# Altium PCB EPCI-0106-V.1.0.PcbDoc
Units mil, origin at the board's own origin, x right, y up, seen from the top; angles counter-clockwise.
Board outline 1762.85 x 2269.87 mil, 2 copper layers (Top Layer, Bottom Layer), stack 62 mil thick; 70 components, 36 nets, 262 pads, 14 vias.
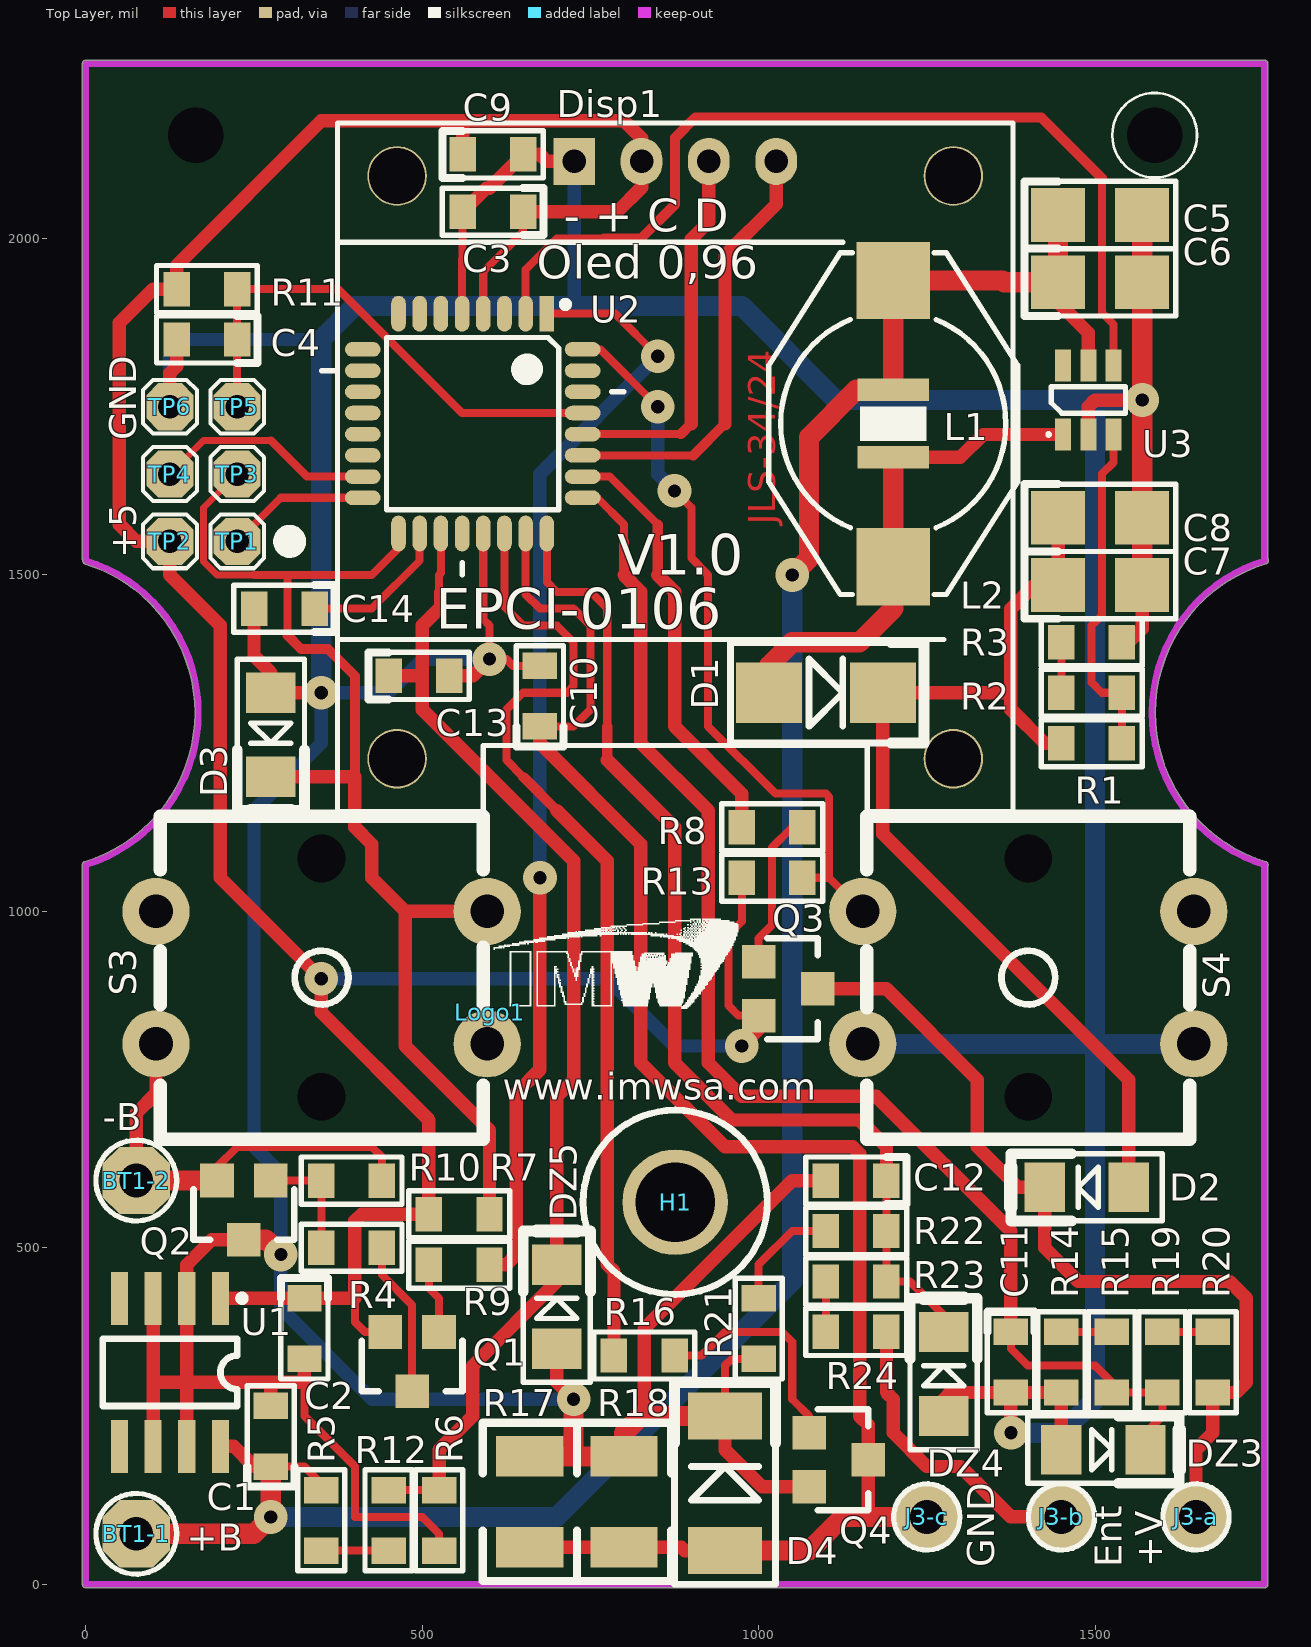
[diagram p0: Top Layer view]
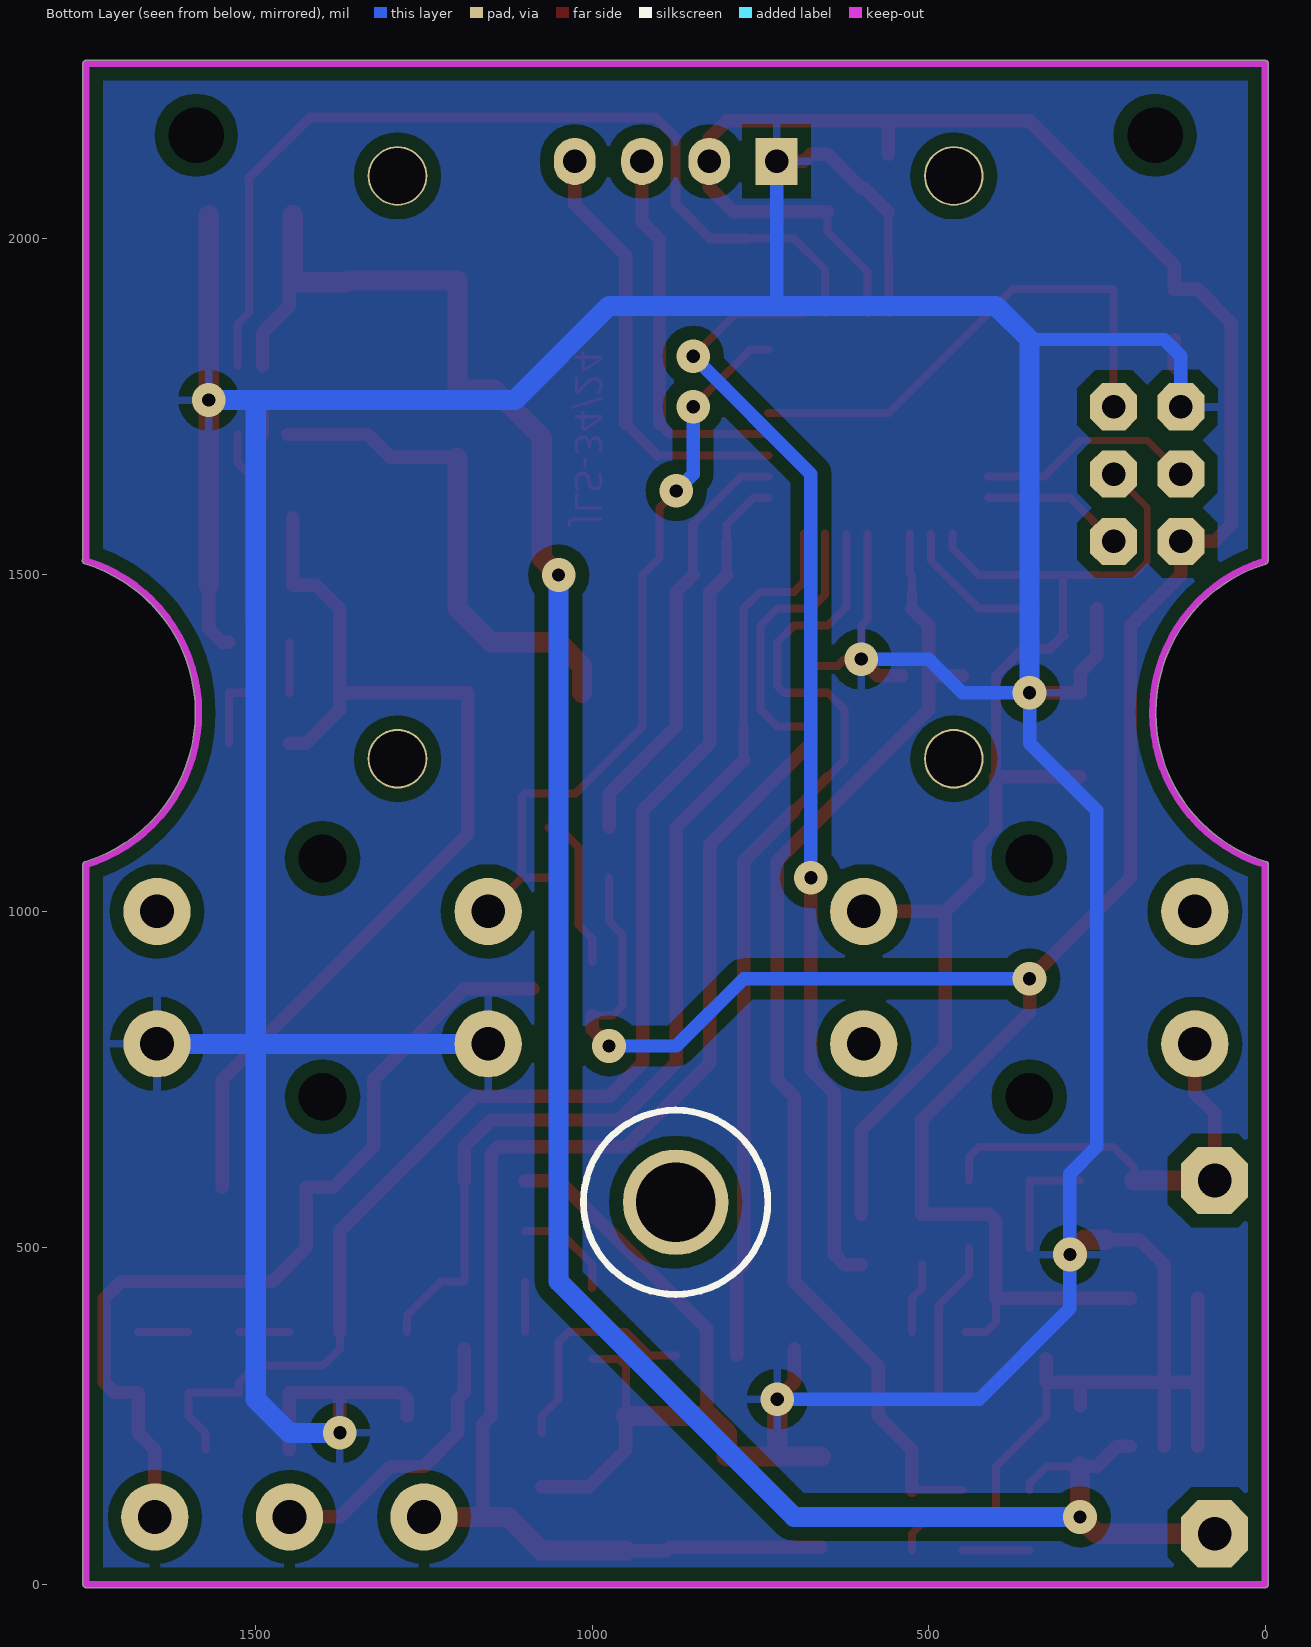
[diagram p1: Bottom Layer view, seen from below]
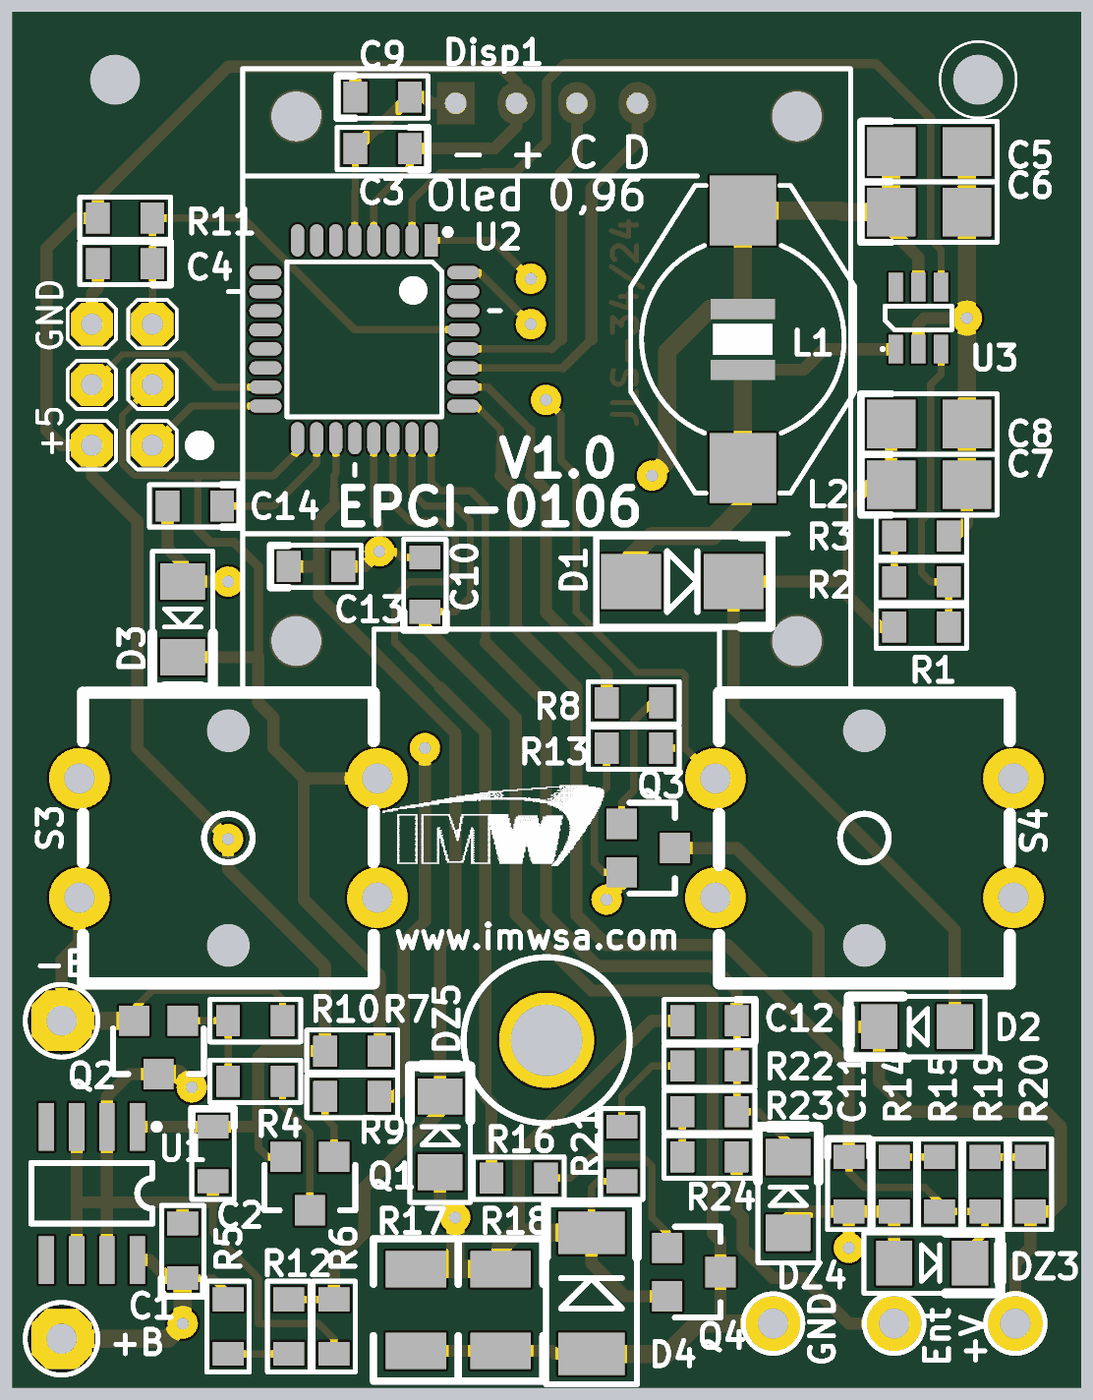
[diagram p2: 3D render of the assembled board from above, using the file's embedded part models]

## Layer stack, top to bottom
Top Layer: signal copper 1.4
Dielectric: core 59.2, FR-4, Dk 4.8
Bottom Layer: signal copper 1.4

## Board outline
-5.01,0 -5.01,1068.38 cw(c-0.09,1069.3) -1.55,1074.1 ccw(c-68.9,1295.28) 162.31,1295.28 ccw(c-68.9,1295.28) -0.86,1516.24 cw(c0.62,1521.04) -4.37,1521.55 cw(c0,1524.02) -5.01,1524.02 -5.01,2259.84 cw(c0,2259.84) 0.06,2264.86 1751.97,2264.86 cw(c1751.97,2259.84) 1756.98,2259.84 1756.98,1524.13 cw(c1752.74,1521.46) 1757.75,1521.46 cw(c1752.74,1521.46) 1754.17,1516.65 cw(c1820.87,1295.28) 1754.18,1516.66 1754.17,1516.65 ccw(c1820.87,1295.28) 1753.52,1074.1 cw(c1752.05,1069.3) 1757.07,1069.3 cw(c1752.05,1069.3) 1756.98,1068.37 1756.98,0 cw(c1751.97,0) 1751.97,-5.02 0,-5.02 cw(c0,0)

## Design rules (kind name [scope] priority, off if disabled: settings)
Clearance Poly [inpoly] p1: gap=20
Clearance Clearance_1 [All] p2: gap=9
ComponentClearance [All] p1 off: gap=10 collisioncheckmode=3 verticalgap=10 showdistances=FALSE
FanoutControl Fanout_BGA [IsBGA] p1 off: bgadir=Out bgaviamode=Centered fanoutstyle=Auto fanoutdirection=Alternating viagrid=1 // Fanout_BGA (Default Rule)
FanoutControl Fanout_LCC [IsLCC] p2 off: bgadir=Out bgaviamode=Centered fanoutstyle=Auto fanoutdirection=Alternating viagrid=1 // Fanout_LCC (Default Rule)
FanoutControl Fanout_SOIC [IsSOIC] p3 off: bgadir=Out bgaviamode=Centered fanoutstyle=Auto fanoutdirection=Alternating viagrid=1 // Fanout_SOIC (Default Rule)
HoleSize [All] p1: absolutevalues=TRUE maxlimit=196.85 minlimit=1 maxpercent=80.000 minpercent=20.000
PolygonConnect [All] p1: connectstyle=Relief reliefconductorwidth=12 reliefentries=4 polygonreliefangle="90 Angle"
RoutingVias [All] p1: holewidth=23.62 width=55 viastyle="Through Hole" minholewidth=19.68 minwidth=50 maxholewidth=29.53 maxwidth=60
SolderMaskExpansion [All] p1: expansion=4
TestPointUsage [All] p1: valid=0 allowmultiple=FALSE
Testpoint [All] p1: side=15 testpointundercomponent=TRUE minsize=40 maxsize=100 preferedsize=60 minholesize=0 maxholesize=40 preferedholesize=32 testpointgrid=1 style=1023 order=0123456789
Width [All] p1: maxlimit=30 minlimit=8 preferedwidth=12 bottomlayer_minwidth=20 bottomlayer_prefwidth=20 minimp=50.000000 maximp=50.000000 favimp=50.000000
14 further rules are at their usual default settings.

## Components (designator, comment, footprint, x,y, rotation, side; value= is the part's Value field where it differs from the comment)
BT1-1 "TEST POINT" TP_1#1 75,75 r90 top
BT1-2 "TEST POINT" TP_1#1 75,600 r90 top
C1 "10uF/50V" C0805MINIMO 275,175 r90 top
C2 "100nF" C0805MINIMO 325,425 r270 top
C3 "100nF" C0805MINIMO 650,2040 r180 top
C4 "100nF" C0805MINIMO 225,1850 r180 top
C5 "10uF 50V X5R" C1206 1445,2035 r0 top
C6 "10uF 50V X5R" C1206 1445,1935 r0 top
C7 "10uF 50V X5R" C1206 1445,1485 r0 top
C8 "10uF 50V X5R" C1206 1445,1585 r0 top
C9 "100nF" C0805MINIMO 560,2125 r0 top
C10 "100nF" C0805MINIMO 675,1275 r90 top
C11 "100nF" C0805MINIMO 1375,375 r270 top
C12 "100nF" C0805MINIMO 1190,600 r180 top
C13 "100nF" C0805MINIMO 450,1350 r0 top
C14 "100nF" C0805MINIMO 340,1450 r180 top
D1 "B340LB-13-F" smb 1100,1325 r180 top
D2 "MBR0520LT1G" DL35 1550,590 r0 top
D3 "MBR0520LT1G" DL35 275,1325 r90 top
D4 "1N4007" DL45 950,50 r270 top
Disp1 "O_led 0.96" "Oled 0.96 Nodotech" 875.98,1660 r0 top locked
DZ3 "5V1 .5W" DL35 1450,200 r180 top
DZ4 "5V1 .5W" DL35 1275,250 r270 top
DZ5 "5V1 .5W" DL35 700,350 r270 top
H1 "TORNILLO" Tornillo 875.98,567.72 r0 top locked
J3-a "+V" TP_1#2 1650,100 r90 top
J3-b "Ent" TP_1#2 1450,100 r90 top
J3-c "GND" TP_1#2 1250,100 r90 top
L1 "10uHy" L1210 1200,1725 r270 top
L2 "22uHy" SMTDR0804 1200,1725 r270 top
Logo1 "LOGO" "IMW Serigrafía" 600,850 r0 top
Q1 "BC807" "SOT23 - BC817" 525,375 r0 top
Q2 "BC817" "SOT23 - BC817" 275,600 r0 top
Q3 "BC807" "SOT23 - BC817" 1000,925 r90 top
Q4 "BC817" "SOT23 - BC817" 1075,225 r90 top
R1 "47K 1/10W" R0805MINIMO 1450,1250 r0 top
R2 "2K2 1/10W" R0805MINIMO 1450,1325 r0 top
R3 "2x330R 1/10W" R0805MINIMO 1450,1400 r0 top
R4 "1K 1/8W" R0805MINIMO 350,500 r0 top
R5 "56K 1/8W" R0805MINIMO 350,50 r90 top
R6 "10K 1/8W" R0805MINIMO 525,50 r90 top
R7 "10K 1/8W" R0805MINIMO 600,550 r180 top
R8 "2K2 1/8W" R0805MINIMO 975,1125 r0 top
R9 "4K7 1/8W" R0805MINIMO 600,475 r180 top
R10 "10K 1/8W" R0805MINIMO 350,600 r0 top
R11 "10K 1/10W" R0805MINIMO 225,1925 r180 top
R12 "27K 1/8W" R0805MINIMO 450,50 r90 top
R13 "10K 1/10W" R0805MINIMO 975,1050 r0 top
R14 "2x33R 1/8W" R0805MINIMO 1450,285 r90 top
R15 "4K7 1/8W" R0805MINIMO 1525,375 r270 top
R16 "2K2 1/8W" R0805MINIMO 875,340 r180 top
R17 "1R 1/2W" R1210 660,190 r270 top
R18 "1R 1/2W" R1210 800,190 r270 top
R19 "27K 1/8W" R0805MINIMO 1600,375 r270 top
R20 "56K 1/8W" R0805MINIMO 1675,375 r270 top
R21 "2x33R 1/8W" R0805MINIMO 1000,335 r90 top
R22 "4K7 1/8W" R0805MINIMO 1100,525 r0 top
R23 "27K 1/8W" R0805MINIMO 1100,450 r0 top
R24 "56K 1/8W" R0805MINIMO 1100,375 r0 top
S3 "" "Pul 12x12 Omron B3F" 350.39,901.57 r180 top locked
S4 "" "Pul 12x12 Omron B3F" 1400.79,901.57 r0 top locked
TP1 "MISO" TP_0 225,1550 r180 top
TP2 "+5" TP_0 125,1550 r180 top
TP3 "SCK" TP_0 225,1650 r180 top
TP4 "MOSI" TP_0 125,1650 r180 top
TP5 "RST" TP_0 225,1750 r180 top
TP6 "GND" TP_0 125,1750 r180 top
U1 "LM78L05-soic8" SOIC8-150 200,425 r270 top
U2 "ATmega328P-AU" TQFP32 575,1725 r270 top
U3 "MT3608" SOT23-6 1490,1760 r0 top

## Footprints (in the part's own frame and the unit in brackets; to place one, negate y for a bottom-side part, rotate by r counter-clockwise, add the part's x,y. Pads: shape width x height; smd on the part's side, far side on the other; paste and mask are expansions set on the pad)
C0805MINIMO [mm]
  rect 1x1.3 smd: 1(0,0) 2(2.286,0)
  oct 0.8x1.1 on Top Paste: z(0,0) z(2.286,0)
  silkscreen extent -0.76,-0.89 3.05,0.89, body extent -0.13,-0.64 2.47,0.62, height 0.78
C1206 [mil]
  rect 80x80 smd: 1(0,0) 2(125,0)
  oct 78x78 on Top Paste: z(0,0) z(125,0)
  silkscreen extent -50,-50 175,50, body extent 0,-30 126,33, height 39
DL35 [mil]
  rect 60x74 smd: 1(0,0) 2(-125,0)
  silkscreen extent -175,-50 50,50, body extent -129,-30 9,27, height 57
DL45 [mil]
  rect 70x110 smd: 1(0,0) 2(-200,0)
  silkscreen extent -250,-75 50,75, body extent -205,-62 4,60, height 96
"IMW Serigrafía" [mil]
  silkscreen extent 6,6 370,138
L1210 [mm] "Inductor SMD 1210"
  rect 0.85x2.7 smd: 1(-1.275,0) 2(1.275,0)
  silkscreen extent -0.65,-1.25 0.65,1.25, body extent -1.6,-1.25 1.6,1.25, height 2.5
"Oled 0.96 Nodotech" [mm] "22 x 28 x 12 mm"
  round 2.25 hole 2.1 unplated: 0(-10.5,-11) 0(-10.5,11) 0(10.5,-11) 0(10.5,11)
  rect 1.575x1.778 hole 0.889: 1(-3.81,11.55)
  oval 1.575x1.778 hole 0.889: 2(-1.27,11.55) 3(1.27,11.55) 4(3.81,11.55)
  silkscreen extent -12.75,-13 12.75,13, body extent -12.75,-13 12.75,13, height 14.1
"Pul 12x12 Omron B3F" [mm]
  round 2.54 hole 1.27: 1(-6.25,2.5) 1(6.25,2.5) 2(-6.25,-2.5) 2(6.25,-2.5)
  round 0 hole 1.8 unplated: 5(0,4.5) 5(0,-4.5)
  silkscreen extent -6.1,-6.1 6.1,6.1
R0805MINIMO [mm]
  rect 1x1.3 smd: 1(0,0) 2(2.286,0)
  oct 0.8x1.1 on Top Paste: z(0,0) z(2.286,0)
  silkscreen extent -0.76,-0.89 3.05,0.89, body extent 0.14,-0.64 2.14,0.62, height 0.44
R1210 [mil]
  rect 60x100 smd: 1(0,0) 2(135,0)
  oct 58x98 on Top Paste: z(0,0) z(135,0)
  silkscreen extent -50,-70 185,70, body extent 5,-50 131,48, height 24
smb [mm] "Diode SMB DO214AA"
  rect 2.5x2.3 smd: 1(2.15,0) 2(-2.15,0)
  silkscreen extent -3.7,-1.9 3.6,1.9, body extent -2.7,-1.8 2.74,1.76, height 2.31
SMTDR0804 [mm] "Inductor SMTDR0804"
  rect 2.92x2.79 smd: 1(-5.4,0) 2(5.4,0)
  silkscreen extent -6.45,-4.7 6.45,4.7, body extent -6.5,-4.7 6.5,4.7, height 5
SOIC8-150 [mm]
  rect 2x0.65 smd: 1(0,0) 2(0,-1.27) 3(0,-2.54) 4(0,-3.81) 5(5.588,-3.81) 6(5.588,-2.54) 7(5.588,-1.27) 8(5.588,0)
  silkscreen extent -0.13,-4.44 4.06,0.94, body extent -0.3,-4.3 5.9,0.53, height 1.7
"SOT23 - BC817" [mil]
  rect 50x50 smd: 1(0,0) 2(-40,-88) 3(-80,0)
  silkscreen extent -115,-88 35,-13, body extent -98,-95 17,3, height 40
SOT23-6 [mm]
  rect 0.6x1.2 smd: 1(-0.95,-1.3) 2(0,-1.3) 3(0.95,-1.3) 4(0.95,1.3) 5(0,1.3) 6(-0.95,1.3)
  silkscreen extent -1.55,-1.35 1.4,0.5, body extent -1.4,-1.3 1.39,1.13, height 1.09
Tornillo [mil]
  round 157 hole 118.11 unplated: 1(0,0)
  silkscreen extent -137,-137 137,137
TP_0 [mil]
  oct 70x70 hole 35: 1(0,0)
  silkscreen extent -40,-40 40,40
TP_1#1 [mil]
  oct 100x100 hole 50: 1(0,0)
  silkscreen extent -60,-60 60,60
TP_1#2 [mil]
  round 100 hole 50: 1(0,0)
  silkscreen extent -49,-49 49,49
TQFP32 [mm]
  rect 1.35x0.55 smd: 1(-4.15,2.8)
  oval 1.35x0.55 smd: 2(-4.15,2) 3(-4.15,1.2) 4(-4.15,0.4) 5(-4.15,-0.4) 6(-4.15,-1.2) 7(-4.15,-2) 8(-4.15,-2.8) 17(4.15,-2.8) 18(4.15,-2) 19(4.15,-1.2) 20(4.15,-0.4) 21(4.15,0.4) 22(4.15,1.2) 23(4.15,2) 24(4.15,2.8)
  oval 0.55x1.35 smd: 9(-2.8,-4.15) 10(-2,-4.15) 11(-1.2,-4.15) 12(-0.4,-4.15) 13(0.4,-4.15) 14(1.2,-4.15) 15(2,-4.15) 16(2.8,-4.15) 25(2.8,4.15) 26(2,4.15) 27(1.2,4.15) 28(0.4,4.15) 29(-0.4,4.15) 30(-1.2,4.15) 31(-2,4.15) 32(-2.8,4.15)
  silkscreen extent -4.62,-5.7 5.7,5.7, body extent -4.5,-4.5 4.52,4.52, height 1.1

## Part data
BT1-1 BT1-2: "Tst Point"
C3: library part "CAP ELECTROLITICO", "Capacitor Electrolítico"
C4 C5 C6 C7 C8 C9 C10 C11 C12 C13 C14: library part "CAP NP", "Capacitor"
D1 D2 D4: library part DIODE-SMALL, "DIODE"
DZ3 DZ4 DZ5: library part ZENER-SMALL, "Zener Diode"
J3-a J3-b J3-c TP1 TP2 TP3 TP4 TP5 TP6: library part TESTPOINT, "TEST POINT"
L1 L2: library part "INDUCTOR CHOKE", "INDUCTOR CHOKE"
Q3 Q4: "TRANSISTOR"
R1 R2 R14 R15 R17 R18 R19 R23: library part RES_SMALL, "Resistencia"
R6 R8 R11 R12 R13 R16 R20 R21 R22 R24: library part RESISTOR
U2: library part PIC16F1826

## Free pads (board coordinates)
  round 60 hole 82.68 unplated: 1(163.39,2153.54) 1(1588.58,2153.54)

## Via types
v1: diameter 50, hole 19.68, Top Layer to Bottom Layer, 14 vias

## Nets (pads, with @x,y where several pads share a name; then routed paths per layer and width w, separated by ;. In a path a pad name is that pad's centre, name@x,y a point inside that pad or via, vN(x,y) a via of type N, cw(c..) or ccw(c..) an arc to the next point about the centre after c; other vN are vias at no path point)
+5V: C2.1 C3.1 C9.1 Disp1.2 Q1.3 Q3.3 R7.2 R11.2 R13.1 TP2.1 U1.1 U2.4 | length 4453
  Top Layer w12: 400,425 400,390 415,375 Q1.3 ; U2.4 590.75,1950.75 650,2010 C3.1 ; R13.1 975,985 955,965 955,860 970,845 Q3.3
  Top Layer w20: U1.1 C2.1 400,425 400,540 410,550 R7.2 510,690 350,850 v1(350,900) 200,1050 200,1425 125,1500 TP2.1 75,1550 50,1575 50,1875 100,1925 R11.2 135,1960 350,2175 560,2175 ; C9.1 560,2175 ; C3.1 790,2040 825.98,2075.98 Disp1.2 825.98,2149.02 800,2175 560,2175 ; v1(975,800) 1000,825 Q3.3
  Bottom Layer w20: v1(350,900) 775,900 875,800 v1(975,800)
+12: C7.1 C8.1 D1.2 D2.1 R1.1 | length 1506.9
  Top Layer w20: C8.1 C7.1 1410,1485 1375,1450 1375,1325 ; R1.1 1425,1250 1375,1300 1375,1325 ; D2.1 1550,750 1184.65,1115.35 D1.2 1375,1325
+BAT: BT1-1.1 C1.1 C5.1 C6.1 L1.1 L2.1 R5.2 U1.8 U3.5 | length 3465.6
  Top Layer w12: C1.1 325,175 350,150 R5.2
  Top Layer w20: U1.8 220,205 ; 225,200 220,205 ; C1.1 250,175 220,205 ; C6.1 1450,1930 1450,1900 1490,1860 U3.5
  Top Layer w30: BT1-1.1 250,75 v1(275,100) C1.1 ; v1(1050,1500) 1075,1525 1075,1705 1145.2,1775.2 L1.1 L2.1 1362.4,1937.6 1365,1935 C6.1 C5.1
  Bottom Layer w30: v1(275,100) 700,100 1050,450 v1(1050,1500)
-BAT: BT1-2.1 Q2.3 R10.2 S3.1@104.33,803.15 | length 653.9
  Top Layer w12: Q2.3 195,620 225,650 425,650 440,635 R10.2
  Top Layer w20: BT1-2.1 75,700 104.33,729.33 S3.1@104.33,803.15
  Top Layer w30: BT1-2.1 Q2.3
ALIM.5: R8.1 U2.26 | length 642.9
  Top Layer w12: U2.26 778.74,1646.26 850,1575
  Top Layer w15: 850,1500 850,1575
  Top Layer w20: 850,1500 875,1475 875,1275 975,1175 R8.1
ALIM.12: U2.2 U3.4 | length 1396.6
  Top Layer w12: U2.2 653.74,1953.74 700,2000 770,2000 ; 1510,2090 1510,1890 1527.4,1872.6 U3.4
  Top Layer w15: 770,2000 825,2000 875.98,2050.98 875.98,2150 905.98,2180 1420,2180 1510,2090
CORRIENTE: C10.1 D4.1 J3-c.1 Q4.2 R17.2 R18.2 U2.23 | length 2517.3
  Top Layer w12: U2.23 653.74,1471.26 675,1450 725,1450 750,1425 750,1300 725,1275 C10.1
  Top Layer w20: R17.2 R18.2 885,55 890,50 D4.1 ; C10.1 675,1250 825,1100 825,775 950,650 1140,650 1150,640 1150,250 1163,237 Q4.2 1163,100
  Top Layer w30: D4.1 1075,50 1125,100 1163,100 J3-c.1
ENC: R9.1 U2.1 | length 1659.2
  Top Layer w12: U2.1 786.61,1888.39 v1(850,1825)
  Top Layer w20: R9.1 625,475 640,490 640,730 675,765 v1(675,1050)
  Bottom Layer w20: v1(675,1050) 675,1650 v1(850,1825)
GND: C1.2 C2.2 C3.2 C4.2 C5.2 C6.2 C7.2 C8.2 C9.2 C10.2 C11.2 C12.2 C13.2 C14.2 D3.1 D4.2 Disp1.1 DZ3.1 DZ4.1 DZ5.1 Q2.2 Q4.3 R3.2 R6.1 R14.1 R17.1 R18.1 R21.1 S4.2 TP6.1 U1.2 U1.3 U1.6 U1.7 U2.5 U2.21 U3.2 | length 11085.4
  Top Layer w12: 325,300 325,250 400,175 400,100 500,100 525,75 R6.1 ; U2.5 559.25,1969.25 560,1970 C3.2 ; U2.21 590.75,1434.25 600,1425 v1(600,1375) 625,1375 635,1365 C10.2 ; D4.2 950,325 960,335 R21.1 ; C11.2 R14.1
  Top Layer w20: U1.6 100,300 ; U1.3 100,300 ; TP6.1 125,1800 135,1810 C4.2 ; U1.7 150,300 ; Q2.2 187,512 150,475 U1.2 150,300 ; C14.2 250,1380 275,1355 D3.1 v1(350,1325) ; C1.2 275,300 ; C2.2 325,300 275,300 ; C13.2 575,1350 v1(600,1375) ; C3.2 595,2075 600,2075 C9.2 675,2125 685.28,2114.72 Disp1.1 ; DZ5.1 700,300 v1(725,275) ; 830,250 830,380 1050,600 C12.2 ; D4.2 950,200 1005,145 Q4.3 ; DZ4.1 1275,275 1285,285 C11.2 ; v1(1375,225) C11.2 ; DZ3.1 R14.1 C11.2 ; U3.2 1490,1750 1500,1760 v1(1570,1760) ; R3.2 1550,1400 1570,1420 C7.2 ; 100,300 150,300 ; 150,300 275,300
  Top Layer w30: Q2.2 268,512 v1(290,490) ; R17.1 725,190 ; v1(725,275) 725,190 ; D4.2 830,250 825,250 800,225 R18.1 725,190 ; C7.2 C8.2 v1(1570,1760) C6.2 C5.2
  Bottom Layer w20: TP6.1 125,1825 150,1850 350,1850 ; v1(600,1375) 500,1375 450,1325 v1(350,1325) 350,1250 250,1150 250,650 290,610 v1(290,490) 290,410 425,275 v1(725,275) ; 725.98,1900 Disp1.1
  Bottom Layer w30: v1(350,1325) 350,1850 400,1900 725.98,1900 975,1900 1115,1760 1500,1760 ; S4.2@1154.72,803.15 1500,803.15 ; v1(1375,225) 1450,225 1500,275 1500,803.15 ; v1(1570,1760) 1500,1760 ; S4.2@1646.85,803.15 1500,803.15 ; 1500,803.15 1500,1760
MED.I: R16.2 U2.22 | length 1439.2
  Top Layer w12: U2.22 622.24,1452.76 650,1425 700,1425 725,1400 725,1335 715,1325 650,1325 625,1300 625,1225 650,1200
  Top Layer w15: 650,1200 700,1150
  Top Layer w20: 700,1150 775,1075 775,475 785,465 R16.2
MISO: TP1.1 U2.16 | length 213.4
  Top Layer w12: TP1.1 289.76,1614.76 U2.16
MOSI: TP4.1 U2.15 | length 329.6
  Top Layer w10: TP4.1 175,1700 275,1700
  Top Layer w12: 275,1700 328.74,1646.26 U2.15
NetC14_1: C14.1 U2.18 | length 226.1
  Top Layer w12: C14.1 425,1450 496.26,1521.26 U2.18
NetD1_1: D1.1 L1.2 L2.2 U3.1 | length 751.6
  Top Layer w20: L1.2 1299.8,1674.8 1333.82,1708.82 U3.1
  Top Layer w30: D1.1 1015.35,1365.35 1050,1400 1150,1400 1200,1450 L2.2 L1.2
NetD2_2: D2.2 J3-a.1 Q3.2 R20.2 | length 1315.4
  Top Layer w20: Q3.2 1190,885 1325,750 1325,650 1385,590 D2.2 1425,500 1475,450 1700,450 1725,425 1725,300 1710,285 R20.2 1675,225 1650,200 J3-a.1
NetJ3-b_1: J3-b.1 R24.2 | length 430.9
  Top Layer w20: R24.2@1190,350 1190,285 1200,275 1200,225 1250,175 1300,175 1375,100 J3-b.1
NetQ1_1: Q1.1 R9.2 | length 106.2
  Top Layer w12: R9.2 510,440 525,425 Q1.1
NetQ1_2: Q1.2 R4.2 | length 231.6
  Top Layer w12: R4.2 440,460 485,415 Q1.2
NetQ2_1: Q2.1 R4.1 R10.1 | length 175
  Top Layer w12: Q2.1 R10.1 R4.1
NetQ3_1: Q3.1 R8.2 | length 235.7
  Top Layer w12: Q3.1 1000,960 1020,980 1020,1095 1050,1125 R8.2
NetQ4_1: Q4.1 R16.1 | length 341.1
  Top Layer w12: R16.1 915,340 950,375 1035,375 1050,360 1050,275 1075,250 Q4.1
NetR1_2: R1.2 R2.2 U3.3 | length 508.5
  Top Layer w12: U3.3 1527.4,1667.4 1510,1650 1510,1440 1495,1425 1495,1340 1510,1325 R2.2 R1.2
NetR2_1: R2.1 R3.1 | length 75
  Top Layer w12: R2.1 R3.1
NetR5_1: R5.1 R12.1 | length 100
  Top Layer w12: R5.1 R12.1
NetR14_2: R14.2 R15.1 | length 75
  Top Layer w12: R14.2 R15.1
NetR19_1: R19.1 R20.1 | length 75
  Top Layer w12: R19.1 R20.1
NetR21_2: R21.2 R22.1 | length 155.7
  Top Layer w12: R21.2@1000,440 1000,475 1050,525 R22.1
NetR23_1: R23.1 R24.1 | length 75
  Top Layer w12: R24.1 R23.1
P.ENC: D3.2 R7.1 S3.2@596.46,1000 TP3.1 U2.17 | length 1831.2
  Top Layer w10: TP3.1 175,1600 175,1520 195,1500 250,1500
  Top Layer w12: 250,1500 300,1500 ; 300,1410 300,1500 ; U2.17 464.76,1539.76 425,1500 300,1500
  Top Layer w15: 300,1410 320,1390 360,1390 400,1350 400,1200
  Top Layer w20: D3.2 400,1200 400,1125 425,1100 425,1050 475,1000 ; S3.2@596.46,1000 475,1000 ; R7.1 600,675 475,800 475,1000
PULSADOR2: R13.2 S4.1@1154.72,1000 U2.32 | length 1106.8
  Top Layer w12: U2.32 764.76,1835.24 v1(850,1750) ; v1(875,1625) 900,1600 900,1525 925,1500 925,1275 1025,1175 1100,1175 1104.72,1170.28 1104.72,1050 ; R13.2 1104.72,1050 ; S4.1@1154.72,1000 1104.72,1050
  Bottom Layer w20: v1(850,1750) 850,1650 v1(875,1625)
RST: C4.1 R11.1 TP5.1 U2.29 | length 764.7
  Top Layer w12: TP5.1 R11.1 375,1925 559.25,1740.75 U2.29
SCL: Disp1.3 U2.28 | length 568.6
  Top Layer w12: U2.28 884.25,1709.25
  Top Layer w15: 884.25,1709.25 900,1725
  Top Layer w20: 900,1725 900,1999.02 925.98,2025 Disp1.3
SDA: Disp1.4 U2.27 | length 652.4
  Top Layer w12: U2.27 902.76,1677.76
  Top Layer w15: 902.76,1677.76 950,1725
  Top Layer w20: 950,1725 950,1975 1025.98,2050.98 Disp1.4
V.BAT: C13.1 DZ5.2 R6.2 R12.2 U2.19 | length 1734.2
  Top Layer w12: R12.2 R6.2 ; 525,1475 525,1500 527.76,1502.76 U2.19
  Top Layer w15: 525,1450 525,1475
  Top Layer w20: C13.1 500,1350 ; R6.2 525,200 575,250 575,325 700,450 DZ5.2 700,725 725,750 725,1075 500,1300 500,1350 ; 525,1450 500,1425 500,1350
V.ENT: C12.1 DZ4.2 R22.2 R23.2 U2.24 | length 1592
  Top Layer w12: U2.24 685.24,1489.76 700,1475 750,1475 775,1450 775,1275 ; C12.1 R22.2 R23.2 1225,450 1275,400 DZ4.2
  Top Layer w15: 775,1225 775,1275
  Top Layer w20: 775,1225 875,1125 875,775 960,690 1150,690 1190,650 C12.1
V.SAL: C11.1 DZ3.2 R15.2 R19.2 U2.25 | length 2024.5
  Top Layer w12: U2.25 760.24,1614.76 800,1575 800,1550 ; C11.1 1375,350 1400,325 1500,325 1525,300 R15.2 R19.2 ; DZ3.2 1575,225 1600,250 R19.2 ; R19.2@1600,275 R19.2
  Top Layer w15: 800,1500 800,1550
  Top Layer w20: 800,1500 825,1475 825,1250 925,1150 925,775 975,725 1175,725 1375,525 C11.1
pads on no net: C1.z C2.z C3.z C4.z C5.z C6.z C7.z C8.z C9.z C10.z C11.z C12.z C13.z C14.z Disp1.0 H1.1 R1.z R2.z R3.z R4.z R5.z R6.z R7.z R8.z R9.z R10.z R11.z R12.z R13.z R14.z R15.z R16.z R17.z R18.z R19.z R20.z R21.z R22.z R23.z R24.z S3.1@596.46,803.15 S3.2@104.33,1000 S3.5 S4.1@1646.85,1000 S4.5 U1.4 U1.5 U2.3 U2.6 U2.7 U2.8 U2.9 U2.10 U2.11 U2.12 U2.13 U2.14 U2.20 U2.30 U2.31 U3.6

## Polygon pours and split planes (outlines as drawn)
GND on Bottom Layer "GND" (solid, remove dead copper, pour order 1000): 0,0 1751.97,0 1750,1075 1625,1150 1600,1300 1650,1450 1751.97,1522.23 1751.97,2259.84 0,2259.84 0,1524.02 100,1450 175,1300 125,1150 0,1075

## Keep-outs
Keep-Out Layer:
  lines w10: -0.09,1069.3 ccw(c-68.9,1295.28) 0.62,1521.04 ; 0,1069.02 0,0 1751.97,0 1751.97,1069.02 ; 0,1524.02 0,2259.84 1751.97,2259.84 1751.97,1535 1751.97,1522.23 1752.74,1521.46 ccw(c1820.87,1295.28) 1752.05,1069.3

## Other copper
Top Layer:
  text "JLS-34/24" at 1025,1575 h40 r90

## Silkscreen, mask and mechanical layers (free items; w line width, h text height)
Top Overlay:
  circle w3.94: c1588.58,2153.54 r62.99
  circle w25: c303,1550 r12
  text "V1.0" at 790,1500 h60
  text "EPCI-0106" at 520,1420 h60
  text "www.imwsa.com" at 620,720 h40
  text "-B" at 25,675 h40
  text "+B" at 150,50 h40
Mechanical 1:
  lines w7.87: 163.39,1996.06 1588.58,1996.06

## Text inside footprints (layer, text, board x,y; h text height)
Disp1: Top Overlay "Oled 0,96" at 670,1940 h49.21; Top Overlay "- + C D" at 710.63,2010 h49.21